# Altium PCB WifiGain.PcbDoc
Units mm, origin at the board's own origin, x right, y up, seen from the top; angles counter-clockwise.
Board outline 99.66 x 40.7 mm, 2 copper layers (Top Layer, Bottom Layer); 97 components, 56 nets, 263 pads, 252 vias.
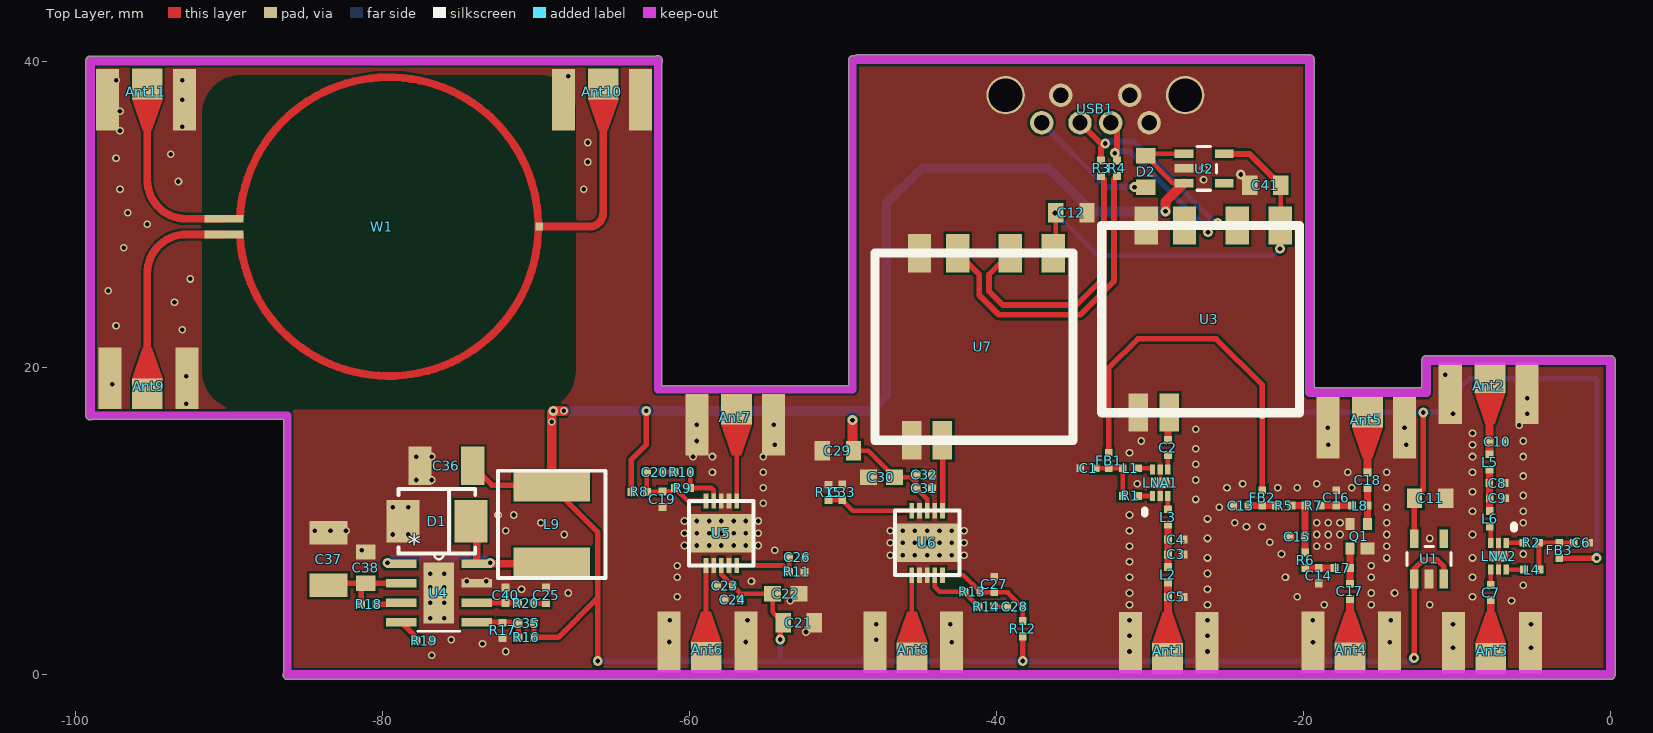
[diagram p0: Top Layer view]
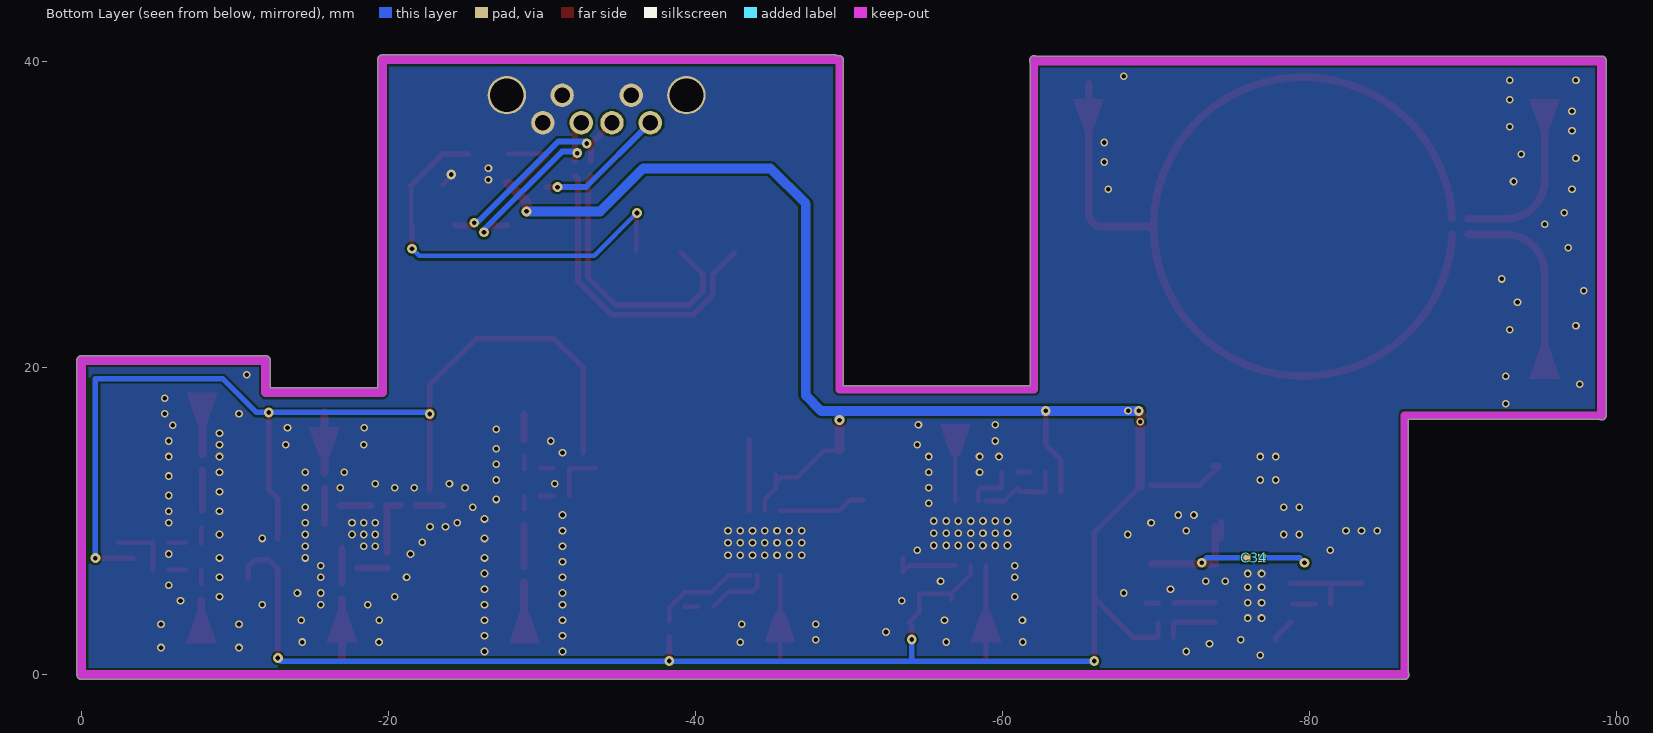
[diagram p1: Bottom Layer view, seen from below]

## Layer stack, top to bottom
Top Solder: solder mask 0.0102, Solder Resist, Dk 3.5
Top Layer: signal copper 0.0356
Dielectric 1: dielectric 0.32, FR-4, Dk 4.8
Bottom Layer: signal copper 0.0356
Bottom Solder: solder mask 0.0102, Solder Resist, Dk 3.5

## Board outline
-86.462,0.16 -86.462,16.655 -98.9,16.655 cw(c-99.06,16.91) -99.36,16.91 -99.36,40.024 cw(c-99.06,40.024) -99.06,40.324 -62.198,40.324 cw(c-62.078,40.1) -61.859,40.229 cw(c-62.078,40.024) -61.777,40.024 cw(c-62.078,40.024) -61.823,39.864 -61.823,18.855 -49.632,18.855 -49.632,40.1 cw(c-49.378,40.1) -49.285,40.337 cw(c-49.1,40.1) -49.1,40.4 -19.6,40.4 cw(c-19.6,40.1) -19.3,40.1 -19.3,18.7 -12.3,18.7 -12.3,20.5 cw(c-12,20.5) -12,20.8 0,20.8 cw(c0,20.5) 0.3,20.5 0.3,0 cw(c0,0) 0,-0.3 -86.208,-0.3 cw(c-86.208,0)

## Design rules (kind name [scope] priority, off if disabled: settings)
Clearance [All] p1: gap=0.152
DiffPairsRouting [All] p1: maxlimit=0.254 minlimit=0.254 mostfreqgap=0.254 toplayer_minwidth=0.381 toplayer_maxwidth=0.381 toplayer_prefwidth=0.381 bottomlayer_minwidth=0.381 bottomlayer_maxwidth=0.381 bottomlayer_prefwidth=0.381 maxuncoupledlength=12.7
MinimumSolderMaskSliver [All] p1 off: minsoldermaskwidth=0.254
PlaneConnect [All] p1: planeconnectstyle=Direct reliefexpansion=0.508 reliefentries=4 reliefconductorwidth=0.254 reliefairgap=0.254
PolygonConnect [All] p1: connectstyle=Direct reliefconductorwidth=0.254 reliefentries=4 polygonreliefangle="90 Angle" airgapwidth=0.254
RoomDefinition power&usb [InComponentClass('power&usb')] p1 off: confinementstyle=ConfineIn formatcopy=TRUE lockcomponents=FALSE outline 18.743,0.306 42.746,0.306 42.746,17.705 18.743,17.705
RoomDefinition LNA [InComponentClass('LNA')] p2 off: confinementstyle=ConfineIn formatcopy=TRUE lockcomponents=FALSE outline 18.743,-8.076 132.281,-8.076 132.281,-0.964 18.743,-0.964
RoutingVias [All] p1: holewidth=0.3 width=0.5 viastyle="Through Hole" minholewidth=0.3 minwidth=0.5 maxholewidth=0.711 maxwidth=1.27
SilkToBoardRegionClearance [All] p1 off:
SilkToSilkClearance [All] p1 off: silktosilkclearance=0.254
SilkToSolderMaskClearance [IsPad] p1 off: minsilkscreentomaskgap=0.254 clearancetoexposedcopper=TRUE
SolderMaskExpansion [All] p1: expansion=0.102
UnpouredPolygon [All] p1: allowunpoured=FALSE
Width [All] p1: maxlimit=0.762 minlimit=0.152 preferedwidth=0.254
23 further rules are at their usual default settings.

## Classes and differential pairs
component class power&usb: Ant9 Ant10 Ant11 C11 C12 C25 C34 C35 C36 C37 C38 C40 C41 D1 D2 L9 R3 R4 R16 R17 R18 R19 R20 U1 U2 U3 U4 U7 USB1 W1
component class LNA: Ant1 Ant2 Ant3 Ant4 Ant5 Ant6 Ant7 Ant8 C1 C2 C3 C4 C5 C6 C7 C8 C9 C10 C13 C14 C15 C16 C17 C18 C19 C20 C21 C22 C23 C24 C26 C27 C28 C29 C30 C31 C32 C33 FB1 FB2 FB3 L1 L2 L3 L4 L5 L6 L7 L8 LNA1 LNA2 Q1 R1 R2 R5 R6 R7 R8 R9 R10 R11 R12 R13 R14 R15 U5 U6
differential pair M2_USB: +M2_USB_P -M2_USB_N
differential pair M1_USB: +M1_USB_P -M1_USB_N

## Components (designator, comment, footprint, x,y, rotation, side; value= is the part's Value field where it differs from the comment)
Ant1 "Antenna" SMA-2 -28.867,1.065 r0 top
Ant2 "Antenna" SMA-2 -7.857,19.359 r180 top
Ant3 "Antenna" SMA-2 -7.807,1.071 r0 top
Ant4 "Antenna" SMA-2 -16.978,1.121 r0 top
Ant5 "Antenna" SMA-2 -15.835,17.123 r180 top
Ant6 "Antenna" SMA-2 -58.933,1.125 r0 top
Ant7 "Antenna" SMA-2 -56.952,17.305 r180 top
Ant8 "Antenna" SMA-2 -45.519,1.119 r0 top
Ant9 "Antenna" SMA-2 -95.352,18.313 r0 top
Ant10 "Antenna" SMA-2 -65.634,38.5 r180 top
Ant11 "Antenna" SMA-2 -95.352,38.5 r180 top
C1 "Cap" 0402 -34.049,13.46 r0 top
C2 "Cap" 0402 -28.842,14.806 r90 top
C3 "Cap" 0402 -28.334,7.846 r180 top
C4 "Cap" 0402 -28.334,8.812 r180 top
C5 "Cap" 0402 -28.334,5.078 r180 top
C6 "Cap" 0402 -1.888,8.615 r180 top
C7 "Cap" 0402 -7.807,5.364 r270 top
C8 "Cap" 0402 -7.392,12.497 r180 top
C9 "Cap" 0402 -7.366,11.506 r180 top
C10 "Cap" 0402 -7.375,15.193 r180 top
C11 "Cap" 0805 -11.753,11.515 r180 top
C12 "Cap" 0805 -35.13,30.126 r180 top
C13 "Cap" 0402 -24.09,11.027 r0 top
C14 "Cap" 0402 -19.01,6.455 r270 top
C15 "Cap" 0402 -20.407,8.995 r180 top
C16 "Cap" 0402 -17.867,11.535 r270 top
C17 "Cap" 0402 -16.978,5.439 r270 top
C18 "Cap" 0402 -15.835,12.678 r270 top
C19 "Cap" 0402 -61.778,11.438 r90 top
C20 "Cap" 0402 -62.286,13.216 r180 top
C21 "Cap" 0805 -52.9,3.4 r0 top
C22 "Cap" 0603 -53.752,5.291 r0 top
C23 "Cap" 0402 -57.7,5.8 r180 top
C24 "Cap" 0402 -57.206,4.91 r180 top
C25 "Cap" 0402 -69.364,5.184 r90 top
C26 "Cap" 0402 -53.015,7.653 r0 top
C27 "Cap" 0402 -40.16,5.894 r270 top
C28 "Cap" 0402 -38.813,4.446 r0 top
C29 "Cap" 0805 -50.345,14.606 r180 top
C30 "Cap" 0603 -47.5,12.879 r180 top
C31 "Cap" 0402 -44.732,12.155 r0 top
C32 "Cap" 0402 -44.732,13.044 r0 top
C33 "Cap" 0402 -50.066,11.888 r90 top
C34 "Cap" 0402 -76.425,7.622 r180 bottom
C35 "Cap" 0402 -70.651,3.376 r180 top
C36 "Cap" 1210 -75.867,13.617 r180 top
C37 "Cap" 1210 -83.537,7.546 r90 top
C38 "Cap" 0805 -81.099,6.987 r90 top
C40 "Cap" 0402 -72.006,5.184 r90 top
C41 "Cap" 0805 -22.5,31.9 r0 top
D1 "Diode" LC-SMB(DO-214AA)_S1 -76.476,10.01 r180 top
D2 "Diode" 0805 -30.3,32.8 r90 top
FB1 "Res2" 0402 -32.703,13.968 r270 top
FB2 "Res2" 0402 -22.693,11.535 r270 top
FB3 "Res2" 0402 -3.336,8.107 r90 top
L1 "Inductor" 0402 -31.28,13.46 r180 top
L2 "Inductor" 0402 -28.842,6.526 r90 top
L3 "Inductor" 0402 -28.842,10.285 r270 top
L4 "Inductor" 0402 -5.14,6.862 r0 top
L5 "Inductor" 0402 -7.883,13.873 r270 top
L6 "Inductor" 0402 -7.874,10.16 r90 top
L7 "Inductor" 0402 -17.486,6.963 r180 top
L8 "Inductor" 0402 -16.343,11.027 r0 top
L9 "Inductor" L7022 -69,9.8 r90 top
LNA1 "SKY65404-31" SKY65404-31 -29.35,12.52 r90 top
LNA2 "SKY65404-31" SKY65404-31 -7.299,7.726 r270 top
Q1 "RF_BJT" SOT343-4(RF) -16.978,8.233 r0 top
R1 "Res2" 0402 -31.28,11.656 r180 top
R2 "Res2" 0402 -5.165,8.615 r0 top
R3 "Res2" 0402 -33.2,33 r90 top
R4 "Res2" 0402 -32.164,33.005 r90 top
R5 "Res2" 0402 -21.296,11.027 r180 top
R6 "Res2" 0402 -19.899,7.471 r270 top
R7 "Res2" 0402 -19.391,11.027 r0 top
R8 "Res2" 0402 -63.302,11.92 r0 top
R9 "Res2" 0402 -60.483,12.174 r0 top
R10 "Res2" 0402 -60.483,13.216 r0 top
R11 "Res2" 0402 -53.015,6.713 r180 top
R12 "Res2" 0402 -38.3,3 r90 top
R13 "Res2" 0402 -41.574,5.411 r180 top
R14 "Res2" 0402 -40.668,4.446 r180 top
R15 "Res2" 0402 -50.955,11.888 r270 top
R16 "Res2" 0402 -70.651,2.436 r180 top
R17 "Res2" 0402 -72.2,2.9 r270 top
R18 "Res2" 0402 -80.921,4.6 r0 top
R19 "Res2" 0402 -77.314,2.238 r0 top
R20 "Res2" 0402 -70.685,4.676 r0 top
U1 "LP5907" SOT23-5 -11.829,7.553 r0 top
U2 "LP5907" SOT23-5 -26.5,33 r270 top
U3 "MT7601-Module" MT7601-Module -33.16,17.092 r270 top
U4 "TPS54340" D8-Pad -76.349,5.336 r0 top
U5 "Sky65174-21" SKY65174-21 -57.943,9.228 r90 top
U6 "Sky65174-21" SKY65174-21 -44.528,8.599 r270 top
U7 "MT7601-Module" MT7601-Module -47.932,15.292 r270 top
USB1 "USB-A" USB-A-MALE -27.719,37.774 r90 top
W1 "WilkinsonDivider" WilkinsonDivider -79.604,29.21 r180 top

## Footprints (in the part's own frame and the unit in brackets; to place one, negate y for a bottom-side part, rotate by r counter-clockwise, add the part's x,y. Pads: shape width x height; smd on the part's side, far side on the other; paste and mask are expansions set on the pad)
0402 [mil] "0402-RES"
  rect 20x20 smd: 1(-19.69,0) 2(20,0)
0603 [mil] "0603-RES"
  rect 44x40 smd: 1(-33.46,0) 2(34,0)
0805 [mm]
  rect 1x1.27 smd: 1(-1.016,0) 2(1.016,0)
  body extent -1.27,-0.76 1.27,0.76, height 0.8
1210 [mm]
  rect 1.52x2.5 smd: 1(-1.715,0) 2(1.715,0)
D8-Pad [mil]
  rect 78.74x157.48 smd: 0(0,0)
  rect 78x22 smd: 1(-97,75) 2(-97,25) 3(-97,-25) 4(-97,-75) 5(97,-75) 6(97,-25) 7(97,25) 8(97,75)
  silkscreen extent -54,-98 54,98, body extent -118,-96 118,96, height 64
L7022 [mm]
  rect 2x5 smd: 1(-2.5,0) 2(2.5,0)
  silkscreen extent -3.5,-3.5 3.5,3.5
LC-SMB(DO-214AA)_S1 [mm]
  rect 2.159x2.743 smd: 1(2.21,0) 2(-2.21,0)
  silkscreen extent -2.5,-2.1 2.5,2.1
MT7601-Module [mm]
  rect 2.5x1.524 smd: 1(-12.192,11.627) 2(-12.192,8.827) 3(-12.192,5.4) 4(-12.192,2.9)
  rect 2.5x1.27 smd: 5(0,2.4) 6(0,4.4)
  silkscreen extent -12.19,0 0.01,12.9
SKY65174-21 [mm]
  rect 2.5x4.4 smd: 0(0,0)
  rect 1x0.3 smd: 1(-2.1,1) 2(-2.1,0.5) 3(-2.1,0) 4(-2.1,-0.5) 5(-2.1,-1) 6(2.1,-1) 7(2.1,-0.5) 8(2.1,0) 9(2.1,0.5) 10(2.1,1)
  silkscreen extent -2.1,-2.1 2.1,2.1
SKY65404-31 [mm]
  rect 0.7x1.2 smd: 0(0,0)
  rect 0.65x0.35 smd: 1(-0.87,0.5) 2(-0.87,0) 3(-0.87,-0.5) 4(0.87,-0.5) 5(0.87,0) 6(0.87,0.5)
  silkscreen extent -2,1 -1.8,1
SMA-2 [mm]
  rect 2x2 smd: 1(0,0)
  rect 1.5x4 smd: GND(-2.413,1.016) GND(2.587,1.016)
  Top Layer region: -0.994,0.99 0.994,0.99 0.305,3 -0.305,3
SOT23-5 [mil] "SOT23-5"
  rect 22x48 smd: 1(-37.4,-51.18) 2(0,-51.18) 3(38,-51.18) 4(38,52) 5(-37.4,52)
  silkscreen extent -56,-17 56,32
SOT343-4(RF) [mm]
  rect 0.6x0.8 smd: 1(0,0) 3(1.15,1.6) 4(0,1.6)
  rect 0.9x0.8 smd: 2(1.15,0)
USB-A-MALE [mm]
  round 2.5 hole 2.2: 0(0,11.7) 0(0,0)
  round 1.524 hole 1.016: 0(0,8.1) 0(0,3.6) 4(-1.8,2.35)
  round 1.524 hole 1: 1(-1.8,9.35) 2(-1.8,6.85) 3(-1.8,4.85)
  body extent 0.2,-0.1 19,11.9, height 4
WilkinsonDivider [mil]
  rect 20x20 smd: 1(-385.83,0)
  rect 100x20 smd: 2(423.35,20) 3(423.35,-20)
  Top Layer lines w20: 382.83,19.97 ccw(c0,0) 382.83,-19.97

## Part data
C1 C2 C3 C4 C5 C6 C7 C8 C9 C10 C11 C12 C13 C14 C15 C16 C17 C18 C19 C20 C21 C22 C23 C24 C25 C26 C27 C28 C29 C30 C31 C32 C33 C34 C35 C36 C37 C38 C40 C41: "Capacitor"
D1 D2: "Default Diode"
FB1 FB2 FB3 R1 R2 R3 R4 R5 R6 R7 R8 R9 R10 R11 R12 R13 R14 R15 R16 R17 R18 R19 R20: "Resistor"

## Via types
v1: diameter 0.5, hole 0.3, Top Layer to Bottom Layer, 231 vias
v2: diameter 0.635, hole 0.305, Top Layer to Bottom Layer, 21 vias

## Nets (pads, with @x,y where several pads share a name; then routed paths per layer and width w, separated by ;. In a path a pad name is that pad's centre, name@x,y a point inside that pad or via, vN(x,y) a via of type N, cw(c..) or ccw(c..) an arc to the next point about the centre after c; other vN are vias at no path point)
3.3: C11.2 FB1.1 FB2.1 FB3.1 U1.5 | length 69.9
  Top Layer w0.356: FB1.1 -32.703,19.997 -30.8,21.9 -25.7,21.9 -22.693,18.893 FB2.1 ; U1.5 C11.2@-12.779,11.505 ; C11.2 -12.2,12.084 v2(-12.2,17.1) ; FB3.1 v2(-0.907,7.607)
  Bottom Layer w0.356: v2(-22.7,17) -22.6,17.1 v2@-12.4,17.1 ; v2(-12.2,17.1) v2@-12.4,17.1 ; v2(-0.907,7.607) -0.907,19.293 -9.207,19.293 -11.4,17.1 v2@-12.4,17.1
3.3-MT7601: C12.2 C41.2 U2.5 U3.1 U7.1 | length 27.1
  Top Layer w0.305: U7.1@-36.146,27.643 C12.2 ; v2(-21.533,27.767) U3.1 ; U3.1@-21.484,29.333 C41.2
  Top Layer w0.381: U2.5 -23.534,33.95 C41.2
  Bottom Layer w0.305: v2(-36.2,30.1) -33.4,27.3 -22,27.3 v2(-21.533,27.767)
3.3LNA1: C1.2 FB1.2 L1.2 R1.2 | length 3.6
  Top Layer w0.305: C1.2 FB1.2 L1.2 R1.2
3.3LNA2: C6.2 FB3.2 L4.2 R2.2 | length 4
  Top Layer w0.305: L4.2@-4.657,6.888 R2.2 FB3.2 C6.2
5V: C21.1 C22.1 C23.1 C24.1 C29.1 C30.1 C31.1 C32.1 C35.1 C36.1 D2.2 L9.2 R8.1 R12.1 R16.1 U1.1 U1.3 U2.1 U2.3 U5.3 U6.3 | length 181.7
  Top Layer w0.305: U5.3 -57.943,6.543 C23.1 -56.706,5.306 C24.1 ; -56.691,5.291 C22.1 -54.602,4.086 C21.1 ; C29.1 -48.377,14.606 C30.1 -45.611,12.879 -45.232,12.5 ; C32.1 -45.232,12.5 ; U6.3 -44.528,11.452 C31.1 -45.232,12.5 ; D2.2 -28.519,32.035 U2.3 ; D2.2@-30.166,33.95 U2.1
  Top Layer w0.356: C36.1@-73.717,13.617 C36.1 -72.892,12.358 L9.2@-69.644,12.358 ; C35.1 R16.1 -68.564,2.436 -66,5 ; L9.2 -66,9.3 -66,5 ; v2(-66,0.9) -66,5 ; R8.1 -63.802,14.024 -62.84,14.986 v2(-62.84,17.2) ; v2(-54.1,2.3) C21.1@-54.1,3.216 ; v2(-38.3,0.9) R12.1 ; v2(-12.8,1.1) -12.8,6.9 -12.2,7.5 -11.3,7.5 -10.864,7.064 U1.3
  Top Layer w0.635: L9.2 v1(-69,16.5) -69,17.1 v2(-68.9,17.2) v1(-68.2,17.2) ; C29.1@-49.4,14.677 v2(-49.4,16.6) ; v2(-29,30.2) -29,30.835 U2.3
  Bottom Layer w0.356: v2(-66,0.9) -54.1,0.9 ; v2(-54.1,2.3) -54.1,0.9 ; v2(-12.8,1.1) -13,0.9 v2(-38.3,0.9) -54.1,0.9
  Bottom Layer w0.635: v2(-68.9,17.2) v1(-68.2,17.2) v2(-62.84,17.2) -49.4,17.2 ; v2(-49.4,16.6) -49.4,17.2 ; v2(-29,30.2) -33.8,30.2 -36.6,33 -44.9,33 -47.2,30.7 -47.2,18.2 -48.2,17.2 -49.4,17.2
GND: Ant1.GND Ant2.GND Ant3.GND Ant4.GND Ant5.GND Ant6.GND Ant7.GND Ant8.GND Ant9.GND Ant10.GND Ant11.GND C1.1 C3.1 C4.1 C5.1 C6.1 C8.1 C9.1 C10.1 C11.1 C12.1 C13.1 C14.2 C15.2 C16.1 C19.1 C21.2 C22.2 C23.2 C24.2 C25.2 C26.2 C27.1 C29.2 C30.2 C31.2 C32.2 C33.2 C36.2 C37.2 C38.2 C40.2 C41.1 D1.1 LNA1.0 LNA1.2 LNA1.5 LNA2.0 LNA2.2 LNA2.5 Q1.2 Q1.4 R11.1 R15.1 R17.2 R19.2 U1.2 U2.2 U3.4 U3.5 U4.0 U4.7 U5.0 U5.2 U5.4 U5.7 U5.8 U6.0 U6.2 U6.4 U6.7 U6.8 U7.4 U7.5 USB1.0 USB1.4 | length 1.2
  Top Layer w0.305: v2(-24.1,32.6) -24.184,32.6 -24.2,32.584 C41.1
  Bottom Layer w0.305: v2@-24.2,32.7 v2(-24.1,32.6)
  other v1: -76.81,1.27 -71.984,1.524 -31.344,1.524 -26.264,1.524 -10.262,1.778 -5.182,1.778 -73.508,2.032 -61.346,2.141 -56.346,2.141 -42.932,2.135 -19.391,2.137 -14.391,2.137 -75.54,2.286 -47.854,2.286 -31.344,2.54 -26.264,2.54 -52.426,2.794 -47.854,3.302 -43.028,3.302 -10.262,3.302 -5.182,3.302 -61.316,3.556 -56.236,3.556 -31.344,3.556 -26.264,3.556 -19.406,3.556 -14.326,3.556 -76.9,3.7 -76,3.7 -31.344,4.572 -26.264,4.572 -18.644,4.572 -15.596,4.572 -11.786,4.572 -76.9,4.7 -76,4.7 -53.442,4.826 -6.452,4.826 -60.808,5.08 -20.422,5.08 -8.992,5.08 -67.92,5.334 -31.344,5.334 -15.596,5.334 -14.072,5.334 -70.968,5.588 -26.264,5.588 -76.9,5.7 -76,5.7 -5.69,5.842 -74.524,6.096 -73.254,6.096 -55.982,6.096 -60.808,6.35 -31.344,6.35 -21.184,6.35 -15.596,6.35 -8.992,6.35 -76.9,6.6 -76,6.6 -26.264,6.604 -60.808,7.112 -15.596,7.112 -31.344,7.366 -26.264,7.62 -14.58,7.62 -8.992,7.62 -46.928,7.799 -46.128,7.799 -45.328,7.799 -44.528,7.799 -43.728,7.799 -42.928,7.799 -42.128,7.799 -21.438,7.874 -5.69,7.874 -81.382,8.128 -54.458,8.128 -31.344,8.382 -19.152,8.382 -18.39,8.382 -14.58,8.382 -60.343,8.428 -59.543,8.428 -58.743,8.428 -57.943,8.428 -57.143,8.428 -56.343,8.428 -55.543,8.428 -46.928,8.599 -46.128,8.599 -45.328,8.599 -44.528,8.599 -43.728,8.599 -42.928,8.599 -42.128,8.599 -22.2,8.636 -26.264,8.89 -11.786,8.89 -79.35,9.144 -78.334,9.144 -68.174,9.144 -19.152,9.144 -18.39,9.144 -17.628,9.144 -14.58,9.144 -8.992,9.144 -60.343,9.228 -59.543,9.228 -58.743,9.228 -57.943,9.228 -57.143,9.228 -56.343,9.228 -55.543,9.228 -84.43,9.398 -83.414,9.398 -82.398,9.398 -71.984,9.398 -46.928,9.399 -46.128,9.399 -45.328,9.399 -44.528,9.399 -43.728,9.399 -42.928,9.399 -42.128,9.399 -31.344,9.398 -23.724,9.652 -22.708,9.652 -69.698,9.906 -24.486,9.906 -19.152,9.906 -18.39,9.906 -17.628,9.906 -14.58,9.906 -5.69,9.906 -60.343,10.028 -59.543,10.028 -58.743,10.028 -57.943,10.028 -57.143,10.028 -56.343,10.028 -55.543,10.028 -26.264,10.16 -72.492,10.414 -71.476,10.414 -31.344,10.414 -8.992,10.668 -5.69,10.668 -79.35,10.922 -78.334,10.922 -25.502,10.922 -14.58,10.922 -55.22,11.176 -27.026,11.43 -5.69,11.684 -8.992,11.938 -55.22,12.192 -24.994,12.192 -21.692,12.192 -20.422,12.192 -16.866,12.192 -14.58,12.192 -30.836,12.446 -23.978,12.446 -19.152,12.446 -77.826,12.7 -76.81,12.7 -27.026,12.7 -5.69,12.954 -58.522,13.208 -55.22,13.208 -17.12,13.208 -14.58,13.208 -8.992,13.208 -27.026,13.716 -77.826,14.224 -76.81,14.224 -59.792,14.224 -58.522,14.224 -55.22,14.224 -8.992,14.224 -5.69,14.224 -31.344,14.478 -27.026,14.732 -54.458,14.986 -18.39,14.986 -13.31,14.986 -8.992,14.986 -59.538,15.24 -30.582,15.24 -5.69,15.24 -8.992,15.748 -27.026,16.002 -18.422,16.107 -13.422,16.107 -5.944,16.256 -59.539,16.289 -54.539,16.289 -10.262,17.018 -5.436,17.018 -92.812,17.672 -5.436,18.034 -97.638,18.942 -92.812,19.45 -10.77,19.558 -93.066,22.498 -97.384,22.752 -93.574,24.276 -97.892,25.038 -92.558,25.8 -96.876,27.832 -95.352,29.356 -96.622,30.118 -97.13,31.642 -66.904,31.642 -93.32,32.15 -26.518,32.258 -26.518,33.02 -66.65,33.42 -97.384,33.674 -93.828,33.928 -66.65,34.69 -97.13,35.452 -93.066,35.706 -97.13,36.722 -93.066,37.484 -97.384,38.754 -93.066,38.754 -67.92,39.008
M1_USB_N: R3.2 U3.2 USB1.2 | length 14.4
  Top Layer w0.381: USB1.2 -33.224,34.629 v2(-32.929,34.629) -33.2,34.357 R3.2 ; v2(-25.599,29.465) -25.418,29.284 U3.2
  Bottom Layer w0.381: v2(-32.929,34.629) -32.795,34.762 -31.075,34.762 -25.779,29.465 v2(-25.599,29.465)
M1_USB_P: R4.2 U3.3 USB1.3 | length 12.9
  Top Layer w0.381: USB1.3 -32.167,35.572 -32.167,34.133 v2(-32.3,34) -32.257,33.957 -32.164,33.957 R4.2 ; U3.3 -26.675,29.284 v2(-26.228,28.836)
  Bottom Layer w0.381: v2(-32.3,34) -32.206,34.094 -31.306,34.094 -26.228,29.016 v2(-26.228,28.836)
M2_USB_N: R3.1 U7.2 | length 18.4
  Top Layer w0.381: U7.2 -40.501,26.088 -40.501,25 -39.601,24.1 -34.8,24.1 -33,25.9 -33,32.3 R3.1
M2_USB_P: R4.1 U7.3 | length 20.5
  Top Layer w0.381: U7.3 -41.136,26.088 -41.136,24.737 -39.864,23.465 -34.537,23.465 -32.365,25.637 -32.365,32.304 R4.1
NetAnt1_1: Ant1.1 C5.2 L2.1 | length 3.4
  Top Layer w0.508: -28.842,2.642 C5.2 L2.1
NetAnt2_1: Ant2.1 C10.2 L5.1 | length 3.7
  Top Layer w0.508: L5.1 C10.2 -7.883,18.083
NetAnt3_1: Ant3.1 C7.2 | length 1
  Top Layer w0.508: -7.807,3.807 C7.2
NetAnt4_1: Ant4.1 C17.2 | length 3.8
  Top Layer w0.508: Ant4.1 C17.2
NetAnt5_1: Ant5.1 C18.1 | length 3.9
  Top Layer w0.508: C18.1 Ant5.1
NetAnt6_1: Ant6.1 U5.1 | length 6
  Top Layer w0.305: Ant6.1@-58.943,1.135 U5.1
NetAnt7_1: Ant7.1 U5.6 | length 3.9
  Top Layer w0.305: U5.6 -56.943,15.257
NetAnt8_1: Ant8.1 U6.6 | length 5.4
  Top Layer w0.305: Ant8.1@-45.528,1.128 U6.6
NetAnt9_1: Ant9.1 W1.2 | length 12.4
  Top Layer w0.508: -95.352,20.244 -95.352,26.162 cw(c-92.812,26.162) -92.812,28.702 W1.2
NetAnt10_1: Ant10.1 W1.1 | length 13.1
  Top Layer w0.508: W1.1 -66.541,29.21 ccw(c-66.541,30.118) -65.634,30.118 Ant10.1
NetAnt11_1: Ant11.1 W1.3 | length 10
  Top Layer w0.508: -95.352,35.814 -95.352,32.258 ccw(c-92.812,32.258) -92.812,29.718 W1.3
NetC2_1: C2.1 LNA1.4 | length 0.9
  Top Layer w0.305: LNA1.4 C2.1@-28.85,14.298
NetC2_2: C2.2 U3.6 | length 1.7
  Top Layer w0.457: C2.2 U3.6@-28.842,17.01
NetC3_2: C3.2 C4.2 L2.2 L3.2 | length 2.7
  Top Layer w0.457: L2.2 C3.2 C4.2 L3.2
NetC7_1: C7.1 LNA2.4 | length 1
  Top Layer w0.305: C7.1@-7.799,5.872 LNA2.4
NetC8_2: C8.2 C9.2 L5.2 L6.2 | length 2.6
  Top Layer w0.457: L6.2@-7.883,10.723 L5.2
NetC13_2: C13.2 FB2.2 R5.2 | length 1.8
  Top Layer w0.457: C13.2 FB2.2 R5.2
NetC14_1: C14.1 L7.2 R6.2 | length 1.9
  Top Layer w0.457: R6.2 L7.2
NetC15_1: C15.1 R5.1 R6.1 R7.1 | length 4
  Top Layer w0.457: R5.1 R7.1 ; R6.1 R7.1@-19.899,11.019
NetC16_2: C16.2 L8.1 R7.2 | length 2
  Top Layer w0.457: R7.2 C16.2 L8.1
NetC17_1: C17.1 L7.1 Q1.1 | length 2.3
  Top Layer w0.457: C17.1 Q1.1
NetC18_2: C18.2 L8.2 Q1.3 | length 2.3
  Top Layer w0.457: Q1.3 C18.2@-15.828,12.163
NetC19_2: C19.2 C20.2 R8.2 R9.1 U5.10 | length 5.6
  Top Layer w0.305: C20.2 R8.2 C19.2@-61.803,11.92 ; C19.2 -61.211,11.946 R9.1 -60.136,11.328 U5.10
NetC20_1: C20.1 R10.1 | length 0.8
  Top Layer w0.305: C20.1 R10.1
NetC25_1: C25.1 R20.2 | length 0.8
  Top Layer w0.356: R20.2 C25.1@-69.372,4.676
NetC26_1: C26.1 R11.2 U5.5 | length 4.5
  Top Layer w0.305: U5.5 -53.938,7.128 R11.2 ; R11.2@-53.515,6.721 C26.1
NetC27_2: C27.2 C28.2 R12.2 R13.1 U6.10 | length 7
  Top Layer w0.305: U6.10 -42.162,6.499 R13.1 -41.049,5.386 C27.2 -39.314,5.386 ; -39.245,5.386 -39.314,5.386 ; C28.2@-38.382,4.446 -38.755,4.819 -38.755,4.826 -39.314,5.386 ; R12.2 C28.2@-38.3,4.441
NetC28_1: C28.1 R14.1 | length 0.9
  Top Layer w0.305: R14.1 C28.1
NetC33_1: C33.1 R15.2 U6.5 | length 5.7
  Top Layer w0.305: R15.2 -50.947,11.388 C33.1 -49.376,10.699 U6.5
NetC34_1: C34.1 D1.2 L9.1 U4.8 | length 10.7
  Top Layer w0.356: D1.2@-74.266,8.866 D1.2
  Top Layer w0.508: D1.2@-73.885,9.629 U4.8 L9.1@-69.76,7.241
  Bottom Layer w0.356: C34.1 -73.322,7.622 v2(-73,7.3)
NetC34_2: C34.2 U4.1 | length 2.9
  Bottom Layer w0.356: v2(-79.7,7.3) -79.378,7.622 C34.2
NetC35_2: C35.2 R16.2 R17.1 U4.5 | length 3.7
  Top Layer w0.356: U4.5 -71.215,3.431 C35.2 R16.2
NetC40_1: C40.1 R20.1 U4.6 | length 2.7
  Top Layer w0.356: U4.6 R20.1@-71.21,4.701
NetD2_1: D2.1 USB1.1 | length 8.5
  Top Layer w0.381: v2(-31.016,31.784) D2.1
  Bottom Layer w0.381: USB1.1 -32.879,31.784 v2(-31.016,31.784)
NetL1_1: L1.1 LNA1.6 | length 0.9
  Top Layer w0.305: L1.1 LNA1.6@-29.92,13.46
NetL3_1: L3.1 LNA1.3 | length 0.9
  Top Layer w0.305: L3.1@-28.85,10.793 LNA1.3
NetL4_1: L4.1 LNA2.6 | length 1.2
  Top Layer w0.305: LNA2.6 L4.1@-5.646,6.856
NetL6_1: L6.1 LNA2.3 | length 1
  Top Layer w0.305: LNA2.3 L6.1@-7.799,9.631
NetLNA1_1: LNA1.1 R1.1 | length 0.9
  Top Layer w0.305: R1.1@-30.774,11.65 LNA1.1
NetLNA2_1: LNA2.1 R2.1 | length 1.1
  Top Layer w0.305: LNA2.1@-6.78,8.615 R2.1
NetR9_2: R9.2 R10.2 U5.9 | length 3.3
  Top Layer w0.305: R10.2 R9.2 -58.574,12.174 -58.443,12.043 U5.9
NetR13_2: R13.2 R14.2 U6.9 | length 4.2
  Top Layer w0.305: U6.9 -44.028,5.728 -43.711,5.411 -42.141,5.411 R14.2
NetR18_2: R18.2 U4.3 | length 1.5
  Top Layer w0.356: R18.2 U4.3@-78.915,4.6
NetR19_1: R19.1 U4.4 | length 1.6
  Top Layer w0.356: U4.4 -77.814,2.433 R19.1
NetU6_1: U6.1 U7.6 | length 4.6
  Top Layer w0.356: U6.1 U7.6@-43.528,15.288
VSYS: C37.1 C38.1 R18.1 U4.2 | length 5.6
  Top Layer w0.356: C37.1@-83.397,5.971 C38.1 U4.2 ; R18.1 C38.1@-81.421,5.649
pads on no net: U1.4 U2.4

## Polygon pours and split planes (outlines as drawn)
GND on Top Layer "Top Layer-No Net" (solid, remove dead copper, pour order 8): -103.226,41.294 -104.75,-6.458 9.042,-6.458 4.978,45.104
GND on Bottom Layer "Top Layer-No Net" (solid, remove dead copper, pour order 10): -104.242,44.088 7.264,47.136 4.47,-4.426 -107.544,-4.426

## Keep-outs
Keep-Out Layer:
  lines w0.508: -99.06,16.91 -86.208,16.91 -86.208,0 ; -62.078,40.1 -62.078,18.6 -49.4,18.6 -49.378,18.6 -49.378,40.1
  lines w0.6: -99.06,16.91 -99.06,40.024 -62.078,40.024 ; -86.208,0 0,0 0,20.5 -12,20.5 -12,18.4 -19.6,18.4 -19.6,40.1 -49.1,40.1

## Other copper
Top Layer:
  pour cut-out: -91.796,19.812 ccw(c-89.256,19.812) -89.256,17.272 -69.952,17.272 ccw(c-69.952,19.812) -67.412,19.812 -67.412,36.798 ccw(c-69.698,36.798) -69.698,39.084 -89.256,39.084 ccw(c-89.256,36.544) -91.796,36.544

## Silkscreen, mask and mechanical layers (free items; w line width, h text height)
Bottom Solder:
  rectangle: -64.5,2.8 -38.7,15.2

## Text inside footprints (layer, text, board x,y; h text height)
U4: Top Overlay "*" at -78.381,7.876 h1.27